# Altium PCB Split_action2026.PcbDoc
Units mm, origin at the board's own origin, x right, y up, seen from the top; angles counter-clockwise.
Board outline 68.71 x 42.8 mm, 2 copper layers (Top Layer, Bottom Layer); 22 components, 16 nets, 81 pads, 0 vias.
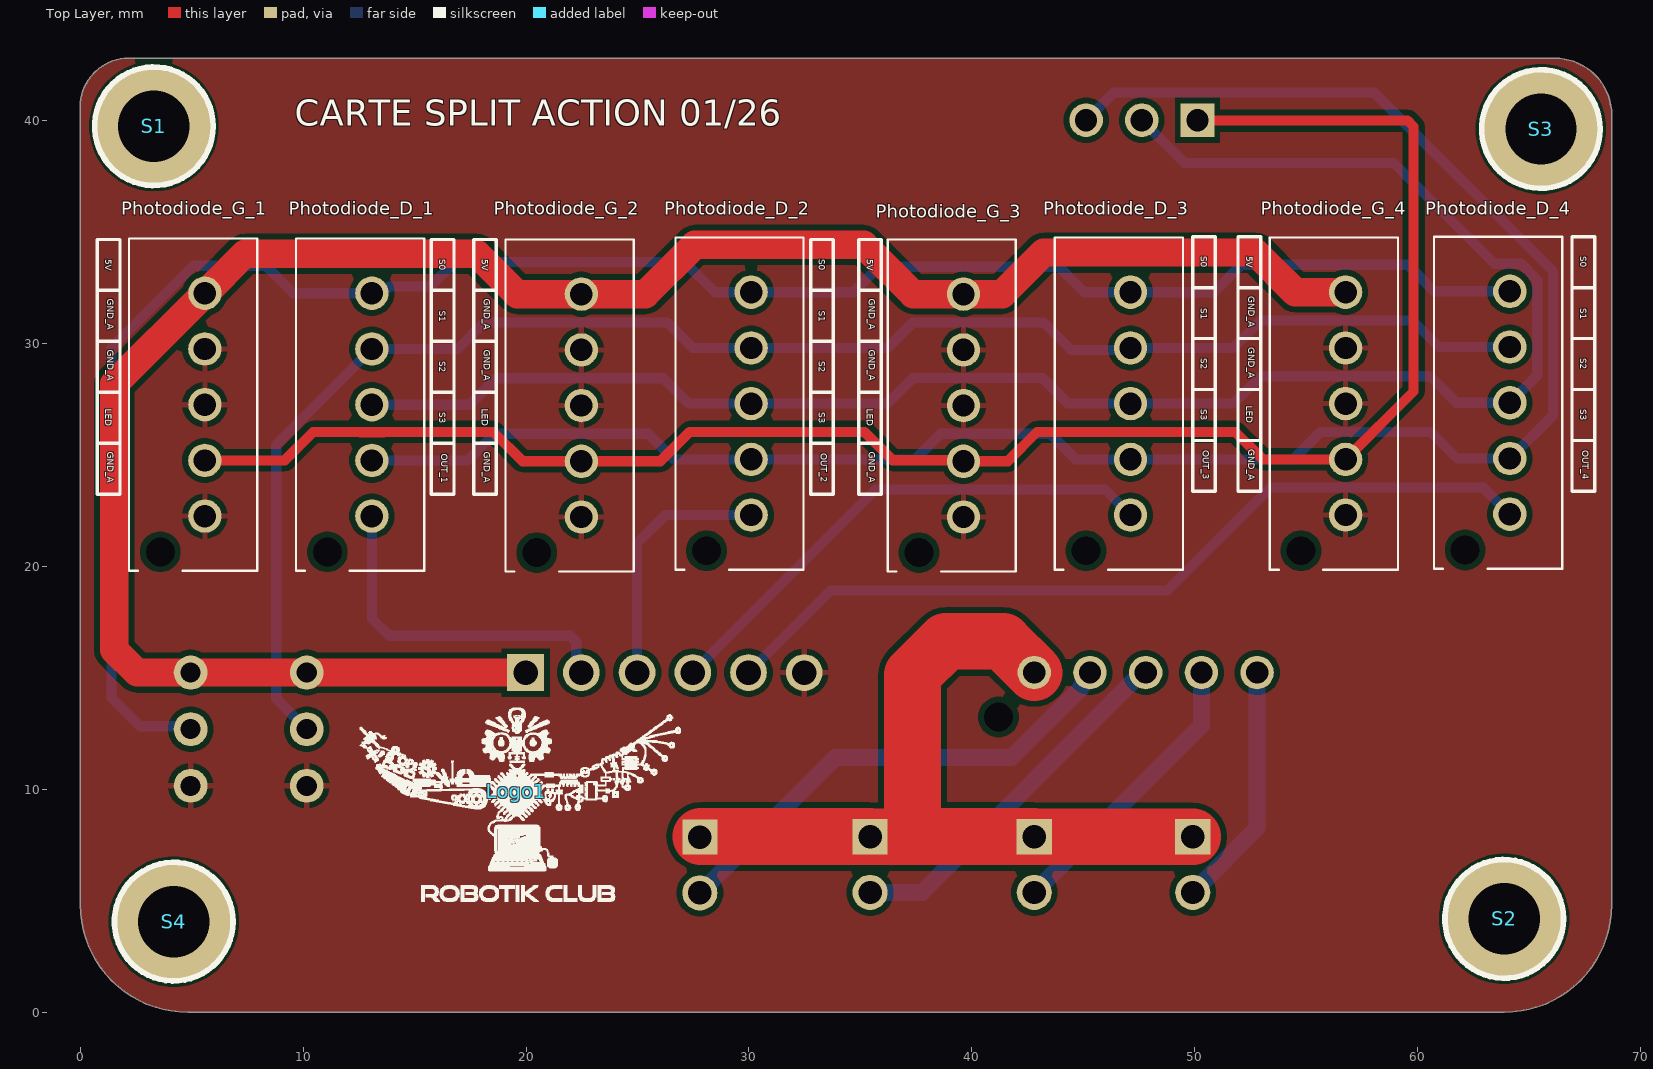
[diagram p0: Top Layer view]
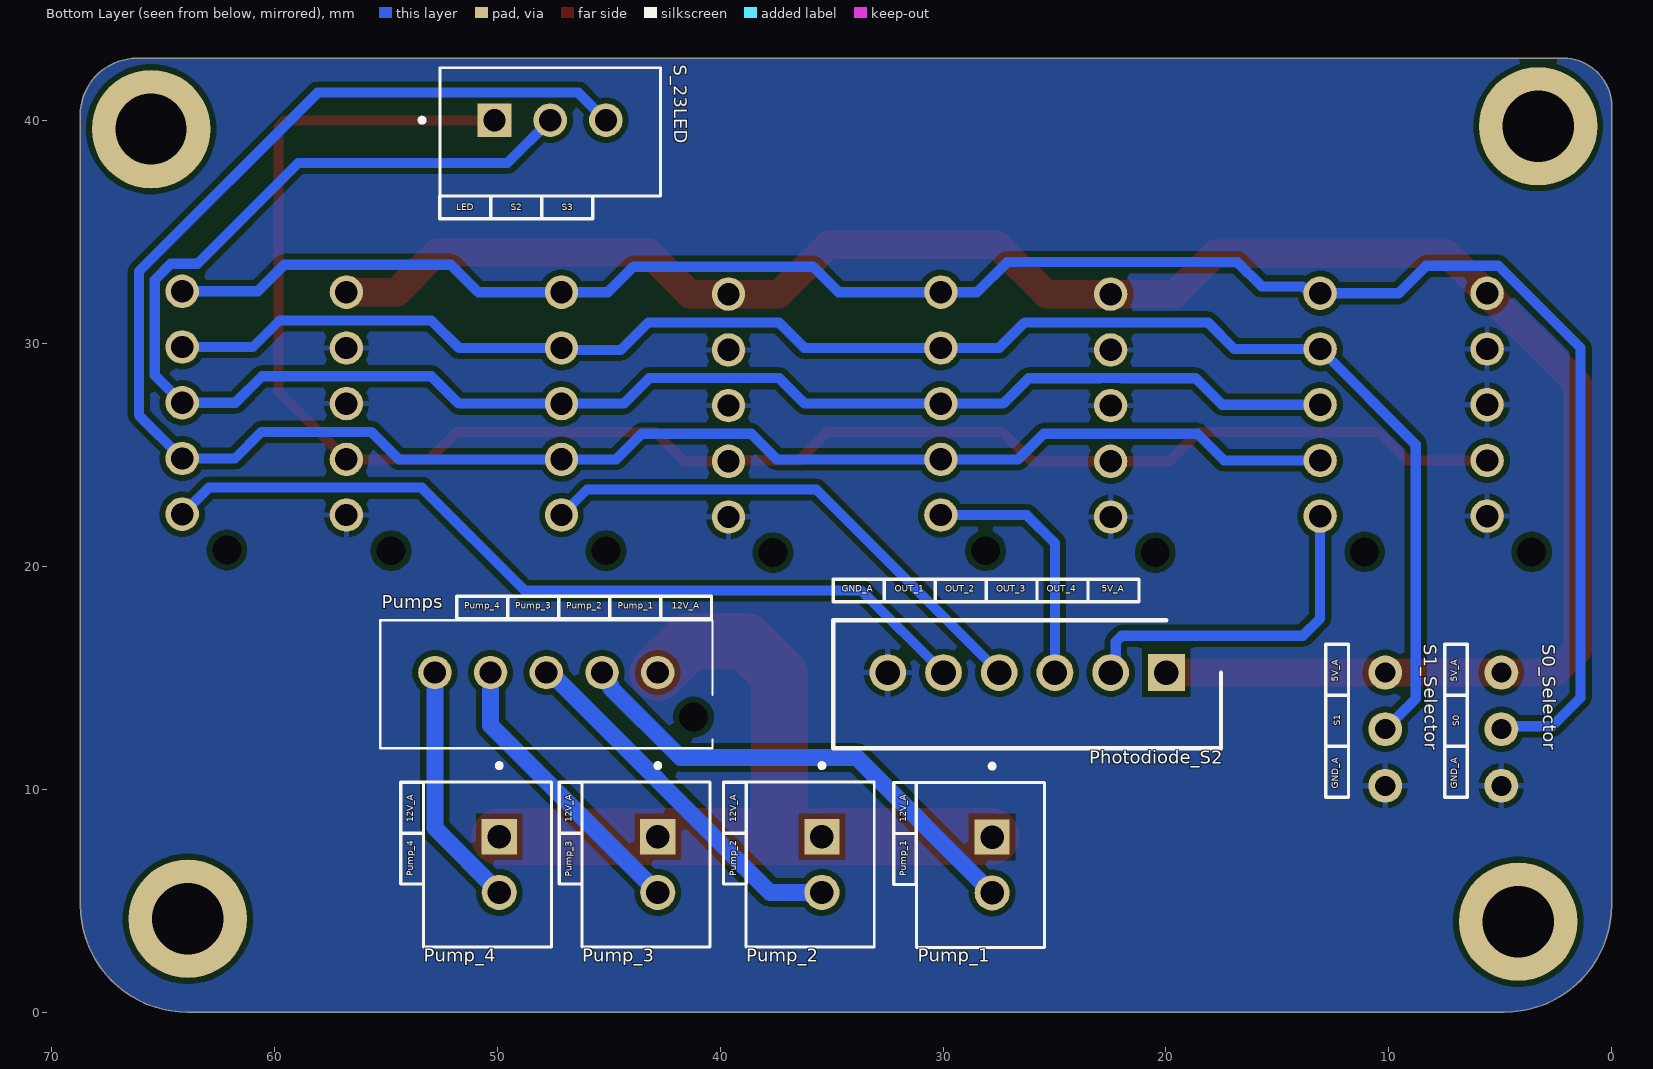
[diagram p1: Bottom Layer view, seen from below]

## Layer stack, top to bottom
Top Solder: solder mask 0.0102, Solder Resist, Dk 3.5
Top Layer: signal copper 0.0356
Dielectric 1: dielectric 0.32, FR-4, Dk 4.8
Bottom Layer: signal copper 0.0356
Bottom Solder: solder mask 0.0102, Solder Resist, Dk 3.5

## Board outline
4.826,0 63.881,0 ccw(c63.881,4.826) 68.707,4.826 68.707,40.259 ccw(c66.167,40.259) 66.167,42.799 2.159,42.799 ccw(c2.159,40.64) 0,40.64 0,4.826 ccw(c4.826,4.826)

## Design rules (kind name [scope] priority, off if disabled: settings)
Clearance [All] p1: gap=0.254 ignorepadtopadclearanceinfootprint=FALSE
PolygonConnect [All] p1: connectstyle=Relief reliefconductorwidth=0.254 reliefentries=4 polygonreliefangle="90 Angle" airgapwidth=0.254
RoutingVias [All] p1: holewidth=0.711 width=1.27 viastyle="Through Hole" minholewidth=0.711 minwidth=1.27 maxholewidth=0.711 maxwidth=1.27
SolderMaskExpansion [All] p1: expansion=0.102 istentingtop=FALSE
SupplyNets "Schematic Supply Nets_2" [InNet('5V_A')] p1: voltage=0.000
SupplyNets "Schematic Supply Nets_1" [InNet('GND_A')] p2: voltage=0.000
SupplyNets "Schematic Supply Nets" [InNet('12V_A')] p3: voltage=0.000
Width [All] p1: maxlimit=2.54 minlimit=0.254 preferedwidth=0.254 minimp=50.000000 maximp=50.000000 favimp=50.000000
30 further rules are at their usual default settings.

## Components (designator, comment, footprint, x,y, rotation, side; value= is the part's Value field where it differs from the comment)
Logo1 "Comment" Logo_lowres 19.558,9.906 r0 top
Photodiode_D_1 "Header 5H" B5BXHAMLFSN 13.081,22.258 r90 top
Photodiode_D_2 "Header 5H" B5BXHAMLFSN 30.099,22.305 r90 top
Photodiode_D_3 "Header 5H" B5BXHAMLFSN 47.117,22.305 r90 top
Photodiode_D_4 "Header 5H" B5BXHAMLFSN 64.135,22.345 r90 top
Photodiode_G_1 "Header 5H" B5BXHAMLFSN 5.588,22.258 r90 top
Photodiode_G_2 "Header 5H" B5BXHAMLFSN 22.479,22.218 r90 top
Photodiode_G_3 "Header 5H" B5BXHAMLFSN 39.624,22.218 r90 top
Photodiode_G_4 "Header 5H" B5BXHAMLFSN 56.769,22.305 r90 top
Photodiode_S2 "Header 6H" SHDR6W64P0X250_1X6_1740X575X700P 19.979,15.24 r0 bottom
Pump_1 "Header 2H" JST_B2B-XH-A_(LF)(SN) 28.321,6.604 r90 bottom
Pump_2 "Header 2H" JST_B2B-XH-A_(LF)(SN) 35.958,6.624 r90 bottom
Pump_3 "Header 2H" JST_B2B-XH-A_(LF)(SN) 43.324,6.624 r90 bottom
Pump_4 "Header 2H" JST_B2B-XH-A_(LF)(SN) 50.436,6.624 r90 bottom
Pumps "Header 5H" B5BXHAMLFSN 42.799,15.24 r0 bottom
S0_Selector "Voltage Selector" "VOLTAGE SELECTOR" 4.953,12.7 r180 bottom
S1 "Screw M3" "Screw M3" 3.302,39.751 r0 top
S1_Selector "Voltage Selector" "VOLTAGE SELECTOR" 10.16,12.7 r180 bottom
S2 "Screw M3" "Screw M3" 63.881,4.191 r0 top
S3 "Screw M3" "Screw M3" 65.532,39.624 r0 top
S4 "Screw M3" "Screw M3" 4.191,4.064 r0 top
S_23LED "Header 3" JST_B3B-XH-A(LF)(SN) 47.625,39.497 r0 bottom

## Footprints (in the part's own frame and the unit in brackets; to place one, negate y for a bottom-side part, rotate by r counter-clockwise, add the part's x,y. Pads: shape width x height; smd on the part's side, far side on the other; paste and mask are expansions set on the pad)
B5BXHAMLFSN [mm]
  round 1.5 hole 1: 1(0,0) 2(2.5,0) 3(5,0) 4(7.5,0) 5(10,0)
  round 0.65 hole 1.3 unplated: MH1(-1.6,2)
  silkscreen extent -2.45,-2.35 12.45,3.4, body extent -2.45,-2.36 12.45,3.39, height 6.92
JST_B2B-XH-A_(LF)(SN) [mm]
  rect 1.575x1.575 / inner round 1.575 / far side rect 1.575x1.575 hole 1.05: 1(1.25,-0.525)
  round 1.575 hole 1.05: 2(-1.25,-0.525)
  silkscreen extent -3.7,-2.88 4.54,2.87, body extent -3.7,-2.88 3.7,2.88, height 7
JST_B3B-XH-A(LF)(SN) [mm]
  rect 1.508x1.508 / inner round 1.508 / far side rect 1.508x1.508 hole 1: 1(2.5,-0.525)
  round 1.508 hole 1: 2(0,-0.525) 3(-2.5,-0.525)
  silkscreen extent -4.95,-2.88 5.85,2.87, body extent -4.95,-2.88 4.95,2.88, height 7
Logo_lowres [mm]
  silkscreen extent -7.01,-4.93 7.39,3.76
"Screw M3" [mm] "M3 iso Screw"
  round 5.32 hole 3.2 unplated: 0(0,0)
  silkscreen extent -2.66,-2.66 2.66,2.66
SHDR6W64P0X250_1X6_1740X575X700P [mm]
  rect 1.65x1.65 hole 1.1: 1(0,0)
  round 1.65 hole 1.1: 2(2.5,0) 3(5,0) 4(7.5,0) 5(10,0) 6(12.5,0)
  silkscreen extent -2.45,-2.35 14.95,3.4, body extent -2.45,-2.88 14.95,2.88, height 7
"VOLTAGE SELECTOR" [mil] "3 Pads for Voltage Selection"
  round 60 hole 35.43: 1(0,100) 2(0,-100) 3(0,0)
  body extent -50,-150 50,150, height 340

## Part data
Photodiode_D_1 Photodiode_D_2 Photodiode_D_3 Photodiode_D_4 Photodiode_G_1 Photodiode_G_2 Photodiode_G_3 Photodiode_G_4 Pumps: "Header, 5-Pin, Right Angle", LatestRevisionDate=17-Jul-2002, LatestRevisionNote="Re-released for DXP Platform.", Publisher="Altium Limited"
Photodiode_S2: "Header, 6-Pin, Right Angle", LatestRevisionDate=17-Jul-2002, LatestRevisionNote="Re-released for DXP Platform.", Publisher="Altium Limited"
Pump_1 Pump_2 Pump_3 Pump_4: "Header, 2-Pin, Right Angle", LatestRevisionDate=17-Jul-2002, LatestRevisionNote="Re-released for DXP Platform.", Publisher="Altium Limited"
S0_Selector S1_Selector: "Selection of voltage by soldering pads"
S_23LED: "Header, 3-Pin", LatestRevisionDate=17-Jul-2002, LatestRevisionNote="Re-released for DXP Platform.", Publisher="Altium Limited"

## Nets (pads, with @x,y where several pads share a name; then routed paths per layer and width w, separated by ;. In a path a pad name is that pad's centre, name@x,y a point inside that pad or via, vN(x,y) a via of type N, cw(c..) or ccw(c..) an arc to the next point about the centre after c; other vN are vias at no path point)
5V_A: Photodiode_G_1.5 Photodiode_G_2.5 Photodiode_G_3.5 Photodiode_G_4.5 Photodiode_S2.1 S0_Selector.1 S1_Selector.1 | length 92.4
  Top Layer w1.27: S1_Selector.1@10.033,15.24 S0_Selector.1 2.54,15.24 1.524,16.256 1.524,28.194 Photodiode_G_1.5 5.616,32.258 7.394,34.036 17.78,34.036 19.598,32.218 Photodiode_G_2.5 25.36,32.218 27.571,34.429 35.151,34.429 37.362,32.218 Photodiode_G_3.5 41.362,32.218 43.227,34.083 52.729,34.083 54.507,32.305 Photodiode_G_4.5 ; S1_Selector.1 Photodiode_S2.1
12V_A: Pump_1.1 Pump_2.1 Pump_3.1 Pump_4.1 Pumps.1 | length 36
  Top Layer w2.54: Pump_1.1@27.829,7.887 Pump_2.1@35.42,7.887 ; Pump_2.1 37.338,7.874 37.338,15.149 38.826,16.637 41.402,16.637 Pumps.1 ; 37.338,7.887 Pump_3.1@42.786,7.887 ; Pump_3.1 Pump_4.1
GND_A: Photodiode_G_1.1 Photodiode_G_1.3 Photodiode_G_1.4 Photodiode_G_2.1 Photodiode_G_2.3 Photodiode_G_2.4 Photodiode_G_3.1 Photodiode_G_3.3 Photodiode_G_3.4 Photodiode_G_4.1 Photodiode_G_4.3 Photodiode_G_4.4 Photodiode_S2.6 S0_Selector.2 S1_Selector.2
LED: Photodiode_G_1.2 Photodiode_G_2.2 Photodiode_G_3.2 Photodiode_G_4.2 S_23LED.1 | length 80.4
  Top Layer w0.457: Photodiode_G_1.2 9.172,24.758 10.449,26.035 12.561,26.035 12.57,26.025 13.592,26.025 13.601,26.035 18.528,26.035 19.845,24.718 Photodiode_G_2.2 26.026,24.718 27.345,26.038 35.176,26.038 36.449,24.765 39.577,24.765 Photodiode_G_3.2 41.609,24.718 42.926,26.035 46.604,26.035 46.606,26.038 47.628,26.038 47.63,26.035 51.816,26.035 53.046,24.805 Photodiode_G_4.2 59.817,27.853 59.817,39.737 59.549,40.005 50.142,40.005 S_23LED.1
OUT_1: Photodiode_D_1.1 Photodiode_S2.2 | length 15.7
  Bottom Layer w0.457: Photodiode_D_1.1 13.081,17.667 13.857,16.891 21.983,16.891 22.251,16.623 22.251,15.468 Photodiode_S2.2
OUT_2: Photodiode_D_2.1 Photodiode_S2.3 | length 11.4
  Bottom Layer w0.457: Photodiode_S2.3 24.979,21.042 26.242,22.305 Photodiode_D_2.1
OUT_3: Photodiode_D_3.1 Photodiode_S2.4 | length 23.5
  Bottom Layer w0.457: Photodiode_S2.4 35.689,23.45 45.971,23.45 Photodiode_D_3.1
OUT_4: Photodiode_D_4.1 Photodiode_S2.5 | length 38.1
  Bottom Layer w0.457: Photodiode_S2.5 33.662,18.923 48.768,18.923 53.383,23.538 62.942,23.538 Photodiode_D_4.1
Pump_1: Pump_1.2 Pumps.2 | length 21.8
  Bottom Layer w0.762: Pump_1.2 33.872,11.43 41.783,11.43 44.93,14.577 44.93,14.671 45.299,15.04 Pumps.2
Pump_2: Pump_2.2 Pumps.3 | length 16.5
  Bottom Layer w0.762: Pump_2.2 37.759,5.374 47.625,15.24 Pumps.3
Pump_3: Pump_3.2 Pumps.4 | length 13
  Bottom Layer w0.762: Pump_3.2 50.299,12.874 Pumps.4
Pump_4: Pump_4.2 Pumps.5 | length 11.1
  Bottom Layer w0.762: Pump_4.2 52.799,8.262 Pumps.5
S0: Photodiode_D_1.5 Photodiode_D_2.5 Photodiode_D_3.5 Photodiode_D_4.5 S0_Selector.3 | length 87.9
  Bottom Layer w0.457: S0_Selector.3@5.207,12.827 2.681,12.827 1.397,14.111 1.397,29.81 5.077,33.49 8.322,33.49 9.554,32.258 Photodiode_D_1.5 13.281,32.458 13.764,32.458 13.87,32.564 15.707,32.564 16.798,33.655 27.125,33.655 28.475,32.305 Photodiode_D_2.5 34.685,32.305 35.831,33.451 43.892,33.451 45.038,32.305 Photodiode_D_3.5 50.847,32.305 52.079,33.537 59.554,33.537 60.746,32.345 Photodiode_D_4.5
S1: Photodiode_D_1.4 Photodiode_D_2.4 Photodiode_D_3.4 Photodiode_D_4.4 S1_Selector.3 | length 73.5
  Bottom Layer w0.457: S1_Selector.3 8.788,14.072 8.788,25.465 Photodiode_D_1.4 16.931,29.758 18.123,30.95 26.327,30.95 27.472,29.805 Photodiode_D_2.4 36.227,29.805 37.372,30.95 43.218,30.95 44.45,29.718 47.03,29.718 Photodiode_D_3.4 51.723,29.805 52.956,31.038 59.767,31.038 60.96,29.845 Photodiode_D_4.4
S2: Photodiode_D_1.3 Photodiode_D_2.3 Photodiode_D_3.3 Photodiode_D_4.3 S_23LED.2 | length 80.7
  Bottom Layer w0.457: Photodiode_D_1.3 17.479,27.258 18.669,28.448 21.966,28.448 21.968,28.45 22.99,28.45 22.992,28.448 26.162,28.448 27.305,27.305 Photodiode_D_2.3 36.207,27.305 37.352,28.45 43.178,28.45 44.323,27.305 Photodiode_D_3.3 51.723,27.305 52.956,28.537 60.557,28.537 61.75,27.345 Photodiode_D_4.3 65.367,28.577 65.367,32.855 64.646,33.577 63.451,33.577 58.928,38.1 49.547,38.1 S_23LED.2
S3: Photodiode_D_1.2 Photodiode_D_2.2 Photodiode_D_3.2 Photodiode_D_4.2 S_23LED.3 | length 88
  Bottom Layer w0.457: Photodiode_D_1.2 17.392,24.758 18.584,25.95 25.485,25.95 26.63,24.805 Photodiode_D_2.2 37.462,24.805 38.608,25.951 43.518,25.951 44.664,24.805 Photodiode_D_3.2 54.414,24.805 55.646,26.037 60.577,26.037 61.769,24.845 Photodiode_D_4.2 66.078,26.789 66.078,33.236 58.056,41.259 46.361,41.259 S_23LED.3
pads on no net: Photodiode_D_1.MH1 Photodiode_D_2.MH1 Photodiode_D_3.MH1 Photodiode_D_4.MH1 Photodiode_G_1.MH1 Photodiode_G_2.MH1 Photodiode_G_3.MH1 Photodiode_G_4.MH1 Pumps.MH1 S1.0 S2.0 S3.0 S4.0

## Polygon pours and split planes (outlines as drawn)
GND_A on Top Layer "GND_A_L01_P000" (solid, remove dead copper, pour order 0): 4.826,0 63.881,0 ccw(c63.881,4.826) 68.707,4.826 68.707,40.259 ccw(c66.167,40.259) 66.167,42.799 2.159,42.799 ccw(c2.159,40.64) 0,40.64 0,4.826 ccw(c4.826,4.826)
GND_A on Bottom Layer "GND_A_L02_P001" (solid, remove dead copper, pour order 1): 4.826,0 63.881,0 ccw(c63.881,4.826) 68.707,4.826 68.707,40.259 ccw(c66.167,40.259) 66.167,42.799 2.159,42.799 ccw(c2.159,40.64) 0,40.64 0,4.826 ccw(c4.826,4.826)

## Silkscreen, mask and mechanical layers (free items; w line width, h text height)
Top Overlay:
  drawing of 160 lines, arcs and shapes, not listed
  text "CARTE SPLIT ACTION 01/26" at 9.624,39.394 h2
  text "S0" at 50.166,33.908 h0.5 r270.13
  text "5V" at 52.198,33.917 h0.5 r270.13
  text "S0" at 67.184,33.908 h0.5 r270.13
  text "5V" at 1.017,33.79 h0.5 r270.13
  text "S0" at 16.003,33.781 h0.5 r270.13
  text "5V" at 17.908,33.79 h0.5 r270.13
  text "S0" at 33.021,33.781 h0.5 r270.13
  text "5V" at 35.18,33.79 h0.5 r270.13
  text "GND_A" at 52.28,32.128 h0.5 r270.13
  text "GND_A" at 1.099,32.001 h0.5 r270.13
  text "GND_A" at 17.99,32.001 h0.5 r270.13
  text "GND_A" at 35.262,32.001 h0.5 r270.13
  text "S1" at 50.166,31.591 h0.5 r270.13
  text "S1" at 67.184,31.591 h0.5 r270.13
  text "S1" at 16.003,31.464 h0.5 r270.13
  text "S1" at 33.021,31.464 h0.5 r270.13
  text "GND_A" at 52.28,29.842 h0.5 r270.13
  text "GND_A" at 1.099,29.715 h0.5 r270.13
  text "GND_A" at 17.99,29.715 h0.5 r270.13
  text "GND_A" at 35.262,29.715 h0.5 r270.13
  text "S2" at 50.166,29.334 h0.5 r270.13
  text "S2" at 67.184,29.334 h0.5 r270.13
  text "S2" at 16.003,29.207 h0.5 r270.13
  text "S2" at 33.021,29.207 h0.5 r270.13
  text "LED" at 52.192,27.204 h0.5 r270.13
  text "LED" at 1.011,27.077 h0.5 r270.13
  text "LED" at 17.902,27.077 h0.5 r270.13
  text "LED" at 35.174,27.077 h0.5 r270.13
  text "S3" at 50.166,27.05 h0.5 r270.13
  text "S3" at 67.184,27.05 h0.5 r270.13
  text "S3" at 16.003,26.923 h0.5 r270.13
  text "S3" at 33.021,26.923 h0.5 r270.13
  text "GND_A" at 52.28,25.27 h0.5 r270.13
  text "OUT_3" at 50.249,25.211 h0.5 r270.13
  text "OUT_4" at 67.267,25.21 h0.5 r270.13
  text "GND_A" at 1.099,25.143 h0.5 r270.13
  text "GND_A" at 17.99,25.143 h0.5 r270.13
  text "GND_A" at 35.262,25.143 h0.5 r270.13
  text "OUT_2" at 33.104,25.082 h0.5 r270.13
  text "OUT_1" at 16.086,25.053 h0.5 r270.13
Bottom Overlay:
  lines w0.15: 6.477,11.938 7.493,11.938 ; 6.477,11.938 6.477,14.224 ; 6.477,11.938 7.493,11.938 ; 6.477,11.938 6.477,9.652 7.493,9.652 7.493,11.938 ; 6.477,14.224 7.493,14.224 ; 6.477,14.224 7.493,14.224 ; 6.477,14.224 6.477,16.51 7.493,16.51 7.493,14.224 ; 7.493,11.938 7.493,14.224 ; 11.811,11.938 12.827,11.938 ; 11.811,11.938 11.811,14.224 ; 11.811,11.938 12.827,11.938 ; 11.811,11.938 11.811,9.652 12.827,9.652 12.827,11.938 ; 11.811,14.224 12.827,14.224 ; 11.811,14.224 12.827,14.224 ; 11.811,14.224 11.811,16.51 12.827,16.51 12.827,14.224 ; 12.827,11.938 12.827,14.224 ; 23.495,18.415 23.495,19.431 ; 23.495,18.415 21.209,18.415 21.209,19.431 23.495,19.431 ; 23.495,18.415 23.495,19.431 ; 23.495,18.415 25.781,18.415 ; 23.495,19.431 25.781,19.431 ; 25.781,18.415 25.781,19.431 ; 25.781,18.415 25.781,19.431 ; 25.781,18.415 28.067,18.415 ; 25.781,19.431 28.067,19.431 ; 28.067,18.415 28.067,19.431 ; 28.067,18.415 28.067,19.431 ; 28.067,18.415 30.353,18.415 ; 28.067,19.431 30.353,19.431 ; 30.353,18.415 30.353,19.431 ; 30.353,18.415 32.639,18.415 ; 30.353,18.415 30.353,19.431 ; 30.353,19.431 32.639,19.431 ; 31.196,8.018 32.212,8.018 ; 31.196,8.018 31.196,5.732 32.212,5.732 32.212,8.018 ; 31.196,8.018 32.212,8.018 ; 31.196,8.018 31.196,10.304 32.212,10.304 32.212,8.018 ; 32.639,18.415 32.639,19.431 ; 32.639,18.415 34.925,18.415 34.925,19.431 32.639,19.431 ; 32.639,18.415 32.639,19.431 ; 38.833,8.038 39.849,8.038 ; 38.833,8.038 38.833,10.324 39.849,10.324 39.849,8.038 ; 38.833,8.038 39.849,8.038 ; 38.833,8.038 38.833,5.752 39.849,5.752 39.849,8.038 ; 42.672,17.653 42.672,18.669 ; 42.672,17.653 44.958,17.653 ; 42.672,17.653 42.672,18.669 ; 42.672,17.653 40.386,17.653 40.386,18.669 42.672,18.669 ; 42.672,18.669 44.958,18.669 ; 44.958,17.653 44.958,18.669 ; 44.958,17.653 47.244,17.653 ; 44.958,17.653 44.958,18.669 ; 44.958,18.669 47.244,18.669 ; 46.199,8.038 47.215,8.038 ; 46.199,8.038 46.199,5.752 47.215,5.752 47.215,8.038 ; 46.199,8.038 47.215,8.038 ; 46.199,8.038 46.199,10.324 47.215,10.324 47.215,8.038 ; 47.244,17.653 47.244,18.669 ; 47.244,17.653 49.53,17.653 ; 47.244,17.653 47.244,18.669 ; 47.244,18.669 49.53,18.669 ; 48.003,35.606 48.003,36.622 ; 48.003,35.606 45.717,35.606 45.717,36.622 48.003,36.622 ; 48.003,35.606 48.003,36.622 ; 48.003,35.606 50.289,35.606 ; 48.003,36.622 50.289,36.622 ; 49.53,17.653 49.53,18.669 ; 49.53,17.653 49.53,18.669 ; 49.53,17.653 51.816,17.653 51.816,18.669 49.53,18.669 ; 50.289,35.606 50.289,36.622 ; 50.289,35.606 52.575,35.606 52.575,36.622 50.289,36.622 ; 50.289,35.606 50.289,36.622 ; 53.311,8.038 54.327,8.038 ; 53.311,8.038 53.311,5.752 54.327,5.752 54.327,8.038 ; 53.311,8.038 54.327,8.038 ; 53.311,8.038 53.311,10.324 54.327,10.324 54.327,8.038
  text "S3" at 47.113,35.866 h0.5
  text "S2" at 49.397,35.866 h0.5
  text "LED" at 51.839,35.86 h0.5
  text "5V_A" at 22.89,18.758 h0.5
  text "OUT_4" at 25.337,18.758 h0.5
  text "OUT_3" at 27.623,18.758 h0.5
  text "OUT_2" at 29.908,18.758 h0.5
  text "OUT_1" at 32.164,18.758 h0.5
  text "GND_A" at 34.54,18.758 h0.5
  text "12V_A" at 42.176,17.996 h0.5
  text "Pump_1" at 44.589,17.996 h0.5
  text "Pump_2" at 46.905,17.996 h0.5
  text "Pump_3" at 49.192,17.996 h0.5
  text "Pump_4" at 51.478,17.996 h0.5
  text "5V_A" at 6.817,14.829 h0.5 r270.13
  text "5V_A" at 12.151,14.829 h0.5 r270.13
  text "S1" at 12.067,12.859 h0.5 r270.13
  text "S0" at 6.733,12.828 h0.5 r270.13
  text "GND_A" at 6.818,10.037 h0.5 r270.13
  text "GND_A" at 12.152,10.037 h0.5 r270.13
  text "12V_A" at 39.174,8.534 h0.5 r270.13
  text "12V_A" at 46.54,8.534 h0.5 r270.13
  text "12V_A" at 53.652,8.534 h0.5 r270.13
  text "12V_A" at 31.537,8.514 h0.5 r270.13
  text "Pump_1" at 31.537,6.101 h0.5 r270.13
  text "Pump_2" at 39.174,6.092 h0.5 r270.13
  text "Pump_3" at 46.54,6.09 h0.5 r270.13
  text "Pump_4" at 53.652,6.091 h0.5 r270.13
Mechanical 1:
  lines w0.254: 0,4.699 ccw(c4.635,4.635) 4.572,0 63.373,0 ccw(c63.5,5.207) 68.707,5.08 68.707,40.132 ccw(c65.977,40.069) 65.913,42.799 2.286,42.799 ccw(c2.413,40.386) 0,40.259 0,4.699